# EAGLE board gimbal_controller (EAGLE 7.4.0)
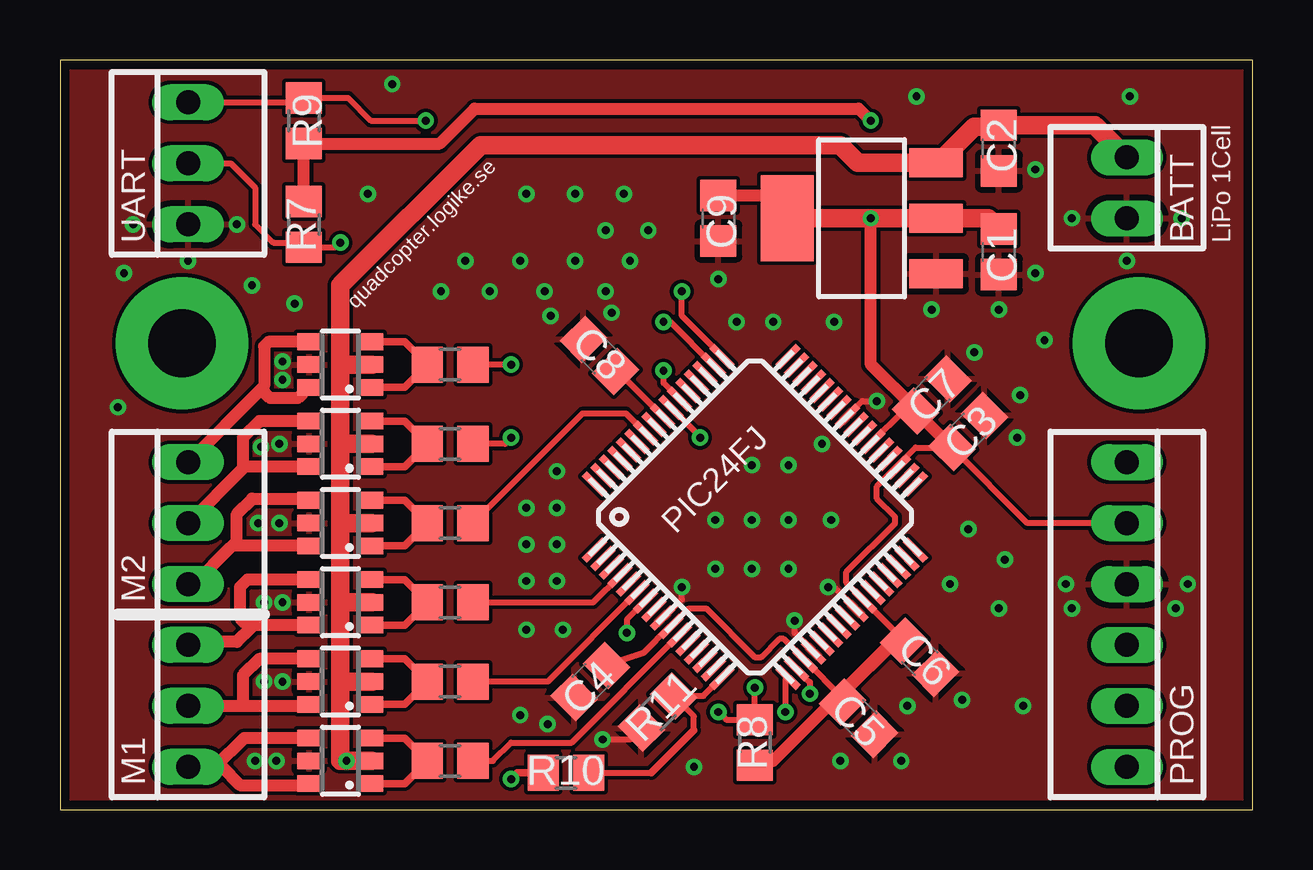
[diagram p0: board, top side]
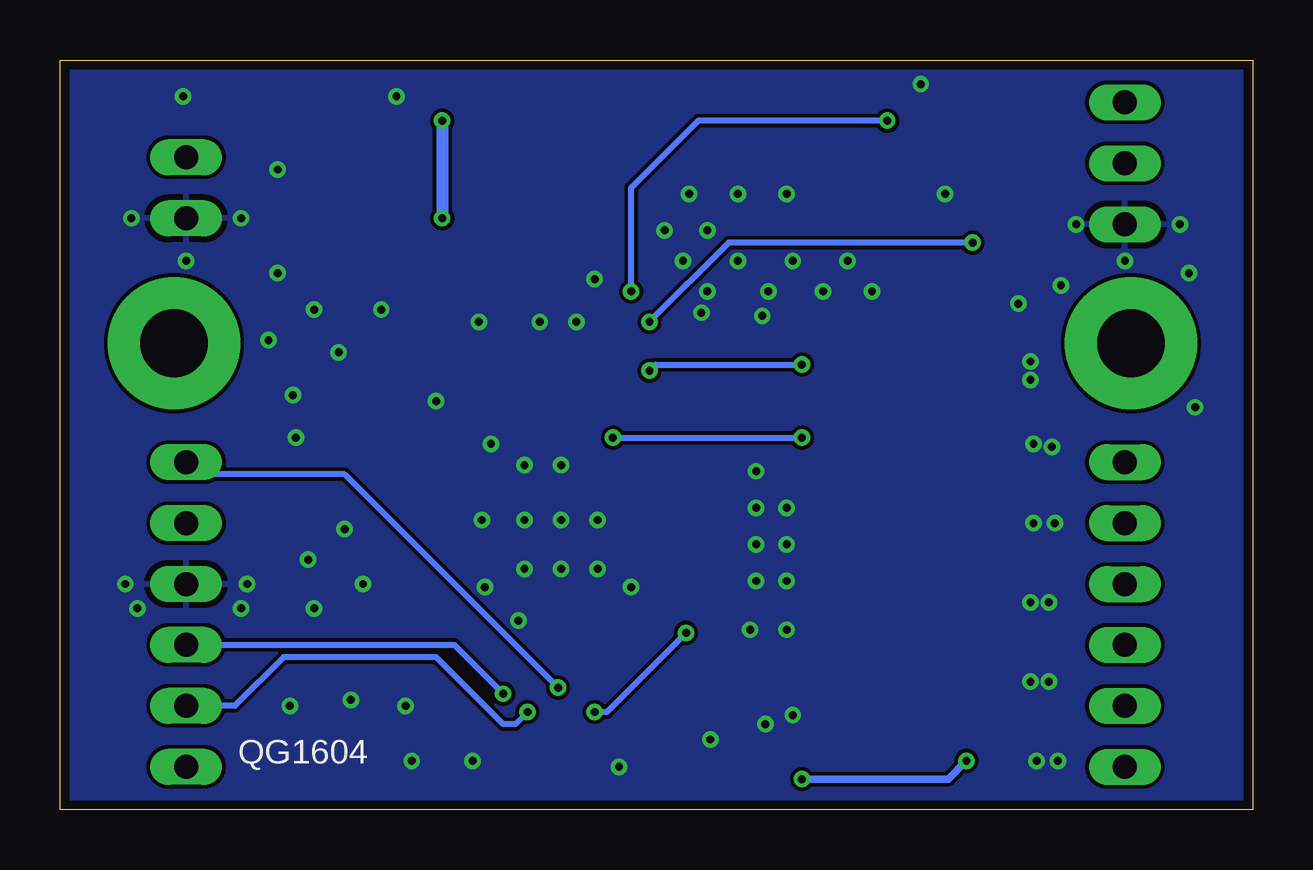
[diagram p1: board, bottom side, seen from below]

Size 49.71 x 31.23 mm. Coordinates in mm from the lower left corner, seen from the top.
Outline: 0,0 49.71,0 49.71,31.23 0,31.23 0,0
Copper layers (1*16): Top 0.0356mm / dielectric 1.5011mm / Bottom 0.0356mm
Design rules "LaenPCBOrder": minimum track width 6mil, minimum drill 13mil, track to track 6mil, track to pad 6mil, pad to pad 6mil, via to via 6mil, smd to smd 6mil, copper to edge 15mil, drill to drill 6mil, minimum pad ring 7mil, minimum via ring 7mil, stop-mask expansion 3mil, vias tented up to drill 0mil, thermal gap 10mil

## Footprints (pad centres in the part's own frame; a part is rotated, then mirrored left to right if it is on the bottom)
22-23-2021 = drill 1 long: 1 -1.27,0; 2 1.27,0
C0805 = smd 1.3 x 1.5: 1 -0.95,0; 2 0.95,0
R0805 = smd 1.3 x 1.5: 1 -0.95,0; 2 0.95,0
SSOT6 = smd 0.69 x 0.99: 1 -0.95,-1.3; 2 0,-1.3; 3 0.95,-1.3; 4 0.95,1.3; 5 0,1.3; 6 -0.95,1.3
TQFP64-10X10 = smd 1.2 x 0.3: 1 -5.7,3.75; 2 -5.7,3.25; 3 -5.7,2.75; 4 -5.7,2.25; 5 -5.7,1.75; 6 -5.7,1.25; 7 -5.7,0.75; 8 -5.7,0.25; 9 -5.7,-0.25; 10 -5.7,-0.75; 11 -5.7,-1.25; 12 -5.7,-1.75; 13 -5.7,-2.25; 14 -5.7,-2.75; 15 -5.7,-3.25; 16 -5.7,-3.75; 33 5.7,-3.75; 34 5.7,-3.25; 35 5.7,-2.75; 36 5.7,-2.25; 37 5.7,-1.75; 38 5.7,-1.25; 39 5.7,-0.75; 40 5.7,-0.25; 41 5.7,0.25; 42 5.7,0.75; 43 5.7,1.25; 44 5.7,1.75; 45 5.7,2.25; 46 5.7,2.75; 47 5.7,3.25; 48 5.7,3.75 | smd 0.3 x 1.2: 17 -3.75,-5.7; 18 -3.25,-5.7; 19 -2.75,-5.7; 20 -2.25,-5.7; 21 -1.75,-5.7; 22 -1.25,-5.7; 23 -0.75,-5.7; 24 -0.25,-5.7; 25 0.25,-5.7; 26 0.75,-5.7; 27 1.25,-5.7; 28 1.75,-5.7; 29 2.25,-5.7; 30 2.75,-5.7; 31 3.25,-5.7; 32 3.75,-5.7; 49 3.75,5.7; 50 3.25,5.7; 51 2.75,5.7; 52 2.25,5.7; 53 1.75,5.7; 54 1.25,5.7; 55 0.75,5.7; 56 0.25,5.7; 57 -0.25,5.7; 58 -0.75,5.7; 59 -1.25,5.7; 60 -1.75,5.7; 61 -2.25,5.7; 62 -2.75,5.7; 63 -3.25,5.7; 64 -3.75,5.7
SOT223 = smd 1.219 x 2.235: 1 -2.311,-3.099; 2 0,-3.099; 3 2.311,-3.099 | smd 3.6 x 2.2: 4 0,3.099
22-23-2061 = drill 1 long: 1 -6.35,0; 2 -3.81,0; 3 -1.27,0; 4 1.27,0; 5 3.81,0; 6 6.35,0
22-23-2031 = drill 1 long: 1 -2.54,0; 2 0,0; 3 2.54,0

## Placement (x,y rotation side)
BATT  22-23-2021  [22-23-2021]  44.45,25.91 270 top
C1  4.7u  [C0805]  39.12,23.24 270 top
C2  4.7u  [C0805]  39.12,27.56 270 top
C3  0.1u  [C0805]  37.85,15.75 45 top
C4  0.1u  [C0805]  22.1,5.33 225 top
C5  0.1u  [C0805]  33.27,3.81 315 top
C6  0.1u  [C0805]  35.81,6.35 315 top
C7  0.1u  [C0805]  36.32,17.27 45 top
C8  10u  [C0805]  22.48,18.92 135 top
C9  4.7u  [C0805]  27.43,24.64 270 top
R1  200  [R0805]  16.26,2.03 0 top
R2  200  [R0805]  16.26,5.33 0 top
R3  200  [R0805]  16.26,8.64 0 top
R4  200  [R0805]  16.26,11.94 0 top
R5  200  [R0805]  16.26,15.24 0 top
R6  200  [R0805]  16.26,18.54 0 top
R7  2k  [R0805]  10.16,24.38 90 top
R8  10k  [R0805]  28.96,2.79 90 top
R9  2k  [R0805]  10.16,28.7 270 top
R10  1.54k  [R0805]  21.08,1.52 180 top
R11  2k  [R0805]  24.89,4.06 45 top
U$1  HALFBRIDGE  [SSOT6]  11.68,2.03 90 top
U$2  HALFBRIDGE  [SSOT6]  11.68,5.33 90 top
U$3  HALFBRIDGE  [SSOT6]  11.68,8.64 90 top
U$4  HALFBRIDGE  [SSOT6]  11.68,11.94 90 top
U$5  HALFBRIDGE  [SSOT6]  11.68,15.24 90 top
U$6  HALFBRIDGE  [SSOT6]  11.68,18.54 90 top
U$7  PIC24FJ  [TQFP64-10X10]  28.96,12.19 45 top
U$8  LDO33  [SOT223]  33.4,24.64 90 top
X1  PROG  [22-23-2061]  44.45,8.13 270 top
X3  22-23-2031  [22-23-2031]  5.33,26.92 90 top
X4  MOTOR  [22-23-2061]  5.33,8.13 90 top

## Library data of the parts
BATT = con-molex; MF: MOLEX; MPN: 22-23-2021; OC_FARNELL: 1462926; OC_NEWARK: 25C3832
C1-C9 R7 R9-R11 = resistor
R1-R6 R8 = rcl
U$1-U$6 = gibal
U$7 U$8 = gimbal
X1 X4 = con-molex; MF: MOLEX; MPN: 22-23-2061; OC_FARNELL: 1462922; OC_NEWARK: 27C1933
X3 = con-molex; MF: MOLEX; MPN: 22-23-2031; OC_FARNELL: 1462950; OC_NEWARK: 30C0862

## Nets
ADC: R10.1 R11.2 U$7.16
GND: BATT.2 C1.2 C2.2 C3.2 C4.2 C5.2 C6.2 C7.2 C8.2 C9.2 R11.1 U$1.5 U$2.5 U$3.5 U$4.5 U$5.5 U$6.5 U$7.9 U$7.20 U$7.25 U$7.41 U$8.1 X1.3 X3.1
M1G1: R1.1 U$1.1 U$1.3
M1G2: R2.1 U$2.1 U$2.3
M1G3: R3.1 U$3.1 U$3.3
M1P1: U$1.4 U$1.6 X4.1
M1P2: U$2.4 U$2.6 X4.2
M1P3: U$3.4 U$3.6 X4.3
M2G1: R4.1 U$4.1 U$4.3
M2G2: R5.1 U$5.1 U$5.3
M2G3: R6.1 U$6.1 U$6.3
M2P1: U$4.4 U$4.6 X4.4
M2P2: U$5.4 U$5.6 X4.5
M2P3: U$6.4 U$6.6 X4.6
MCLR: R8.2 U$7.7 X1.1
N$3: C8.1 U$7.56
NC: X1.6
PGEC2: U$7.17 X1.5
PGED2: U$7.18 X1.4
PWM1: R3.2 U$7.4
PWM2: R2.2 U$7.6
PWM3: R1.2 U$7.11
PWM4: R6.2 U$7.54
PWM5: R5.2 U$7.55
PWM6: R4.2 U$7.58
RX: R7.1 U$7.50 X3.2
TX: R9.1 U$7.49 X3.3
VCC: BATT.1 C2.1 R10.2 U$1.2 U$2.2 U$3.2 U$4.2 U$5.2 U$6.2 U$8.3
VDD: C1.1 C3.1 C4.1 C5.1 C6.1 C7.1 C9.1 R7.2 R8.1 R9.2 U$7.10 U$7.19 U$7.26 U$7.35 U$7.38 U$8.2 U$8.4 X1.2

## Tracks (layer width: path | path; a pad name or v marks a point on that pad's centre or on a via)
ADC
  Top 0.254: U$7.16 26.8,4.74 R11.2 26.42,3.88 26.42,3.3 | R10.1 24.64,1.52
  Top 0.305: 24.64,1.52 26.42,3.3
GND  (via drill 0.33, 0.33 pad 0.3)
  Top 0.254: U$7.41 33.43,17.02 v34.04,17.02 | U$7.25 33.16,8.37 32.26,9.27 v32,9.27 | U$7.20 30.61,7.37 v30.61,7.87 | U$7.9 25.13,7.99 25.91,8.76 v25.91,9.27 | v22.61,2.92 23.75,2.92 R11.1
  other vias: 39.88,15.49 38.1,19.05 31.75,15.24 20.32,3.56 35.05,2.03 37.59,4.57 20.45,20.57 22.99,20.7 9.27,18.67 9.27,17.91 8.38,15.11 9.14,15.24 8.26,11.94 9.14,11.94 8.13,2.03 9.02,2.03 8.51,5.33 9.27,5.33 8.51,8.64 9.27,8.64 40.01,17.27 41.91,9.4 42.16,8.38 46.48,8.38 46.99,9.4 3.05,24.38 7.37,24.38 5.33,22.86 27.43,22.1 36.32,20.83 39.12,20.83 40.64,22.35 40.64,26.67 42.16,24.64 44.45,22.86 46.74,24.64 19.43,25.65 21.46,25.65 23.5,25.65 22.73,24.13 24.51,24.13 16.89,22.86 19.18,22.86 21.46,22.86 23.75,22.86 15.88,21.59 17.91,21.59 20.19,21.59 22.73,21.59 20.7,14.1 20.7,12.57 20.7,11.05 20.7,9.53 19.43,12.57 19.43,11.05 19.43,9.53 28.83,12.06 30.35,14.35 28.83,14.35 30.35,12.06 27.3,12.06 27.3,10.03 28.83,10.03 30.35,10.03 32.13,12.06 8,21.84 9.78,21.08 2.67,22.35 2.41,16.76 12.83,25.65 35.69,29.72 44.58,29.72 41.02,19.56 37.85,11.68 37.08,9.4 39.37,10.41 39.12,8.38 20.95,7.49 19.43,7.49 19.18,3.94 32.51,2.03 35.31,4.32 40.13,4.32 26.42,1.78 32.26,20.32 29.72,20.32 28.19,20.32 13.84,30.23
  pour Top: 0,31.24 49.78,31.24 49.78,0 0,0
  pour Bottom: 0,31.24 49.78,31.24 49.78,0 0,0
M1G1
  Top 0.305: U$1.1 14.36,1.08 R1.1 14.36,2.98 U$1.3
M1G2
  Top 0.305: U$2.1 14.36,4.38 R2.1 14.36,6.28 U$2.3
M1G3
  Top 0.305: U$3.1 14.36,7.69 R3.1 14.36,9.59 U$3.3
M1P1
  Top 0.508: X4.1 6.48,1.78 | 6.48,1.78 6.73,1.78 7.49,1.02 10.32,1.02 U$1.6 | U$1.4 7.68,2.98 6.48,1.78
M1P2
  Top 0.508: X4.2 7.49,4.32 | 7.49,4.32 10.32,4.32 U$2.6 | U$2.4 8.32,6.28 7.62,5.59 7.62,4.45 7.49,4.32
M1P3
  Top 0.508: U$3.6 8.07,7.69 7.94,7.56 | 7.94,7.56 7.37,6.99 5.46,6.99 X4.3 | U$3.4 7.81,9.59 7.49,9.27 7.49,8 7.94,7.56
M2G1
  Top 0.305: U$4.3 14.36,12.89 R4.1 14.36,10.99 U$4.1
M2G2
  Top 0.305: U$5.1 14.36,14.29 R5.1 14.36,16.19 U$5.3
M2G3
  Top 0.305: U$6.1 14.36,17.59 R6.1 14.36,19.49 U$6.3
M2P1
  Top 0.508: X4.4 5.59,9.4 7.11,10.92 7.18,10.99 | 7.18,10.99 7.37,11.18 7.37,12.32 8,12.95 10.32,12.95 U$4.4 | U$4.6 7.18,10.99
M2P2
  Top 0.508: U$5.4 8.32,16.19 7.62,15.49 7.62,14.22 | 7.62,14.22 X4.5 | U$5.6 7.69,14.29 7.62,14.22
M2P3
  Top 0.508: U$6.4 8.7,19.49 8.51,19.3 8.51,17.65 8.38,17.53 | 8.38,17.53 X4.6 | U$6.6 10.35,17.59 9.91,17.14 8.76,17.14 8.38,17.53
MCLR  (via drill 0.33)
  Top 0.254: U$7.7 23.62,7.92 v23.62,7.37 | v27.43,4.06 27.75,3.74 R8.2 v28.96,5.08
  Bottom 0.254: v23.62,7.37 26.92,4.06 v27.43,4.06 | v28.96,5.08 37.85,13.97 43.94,13.97 X1.1
N$1  (via drill 2.82 pad 5.51)
  other vias: 44.96,19.43
N$2  (via drill 2.82 pad 5.51)
  other vias: 5.08,19.43
N$3
  Top 0.254: U$7.56 22.87,18.63 C8.1
PGEC2  (via drill 0.33)
  Top 0.254: U$7.17 30.23,5.4 v30.23,4.06
  Bottom 0.254: v30.23,4.06 30.73,3.56 31.24,3.56 34.04,6.35 40.39,6.35 42.42,4.32 X1.5
PGED2  (via drill 0.33)
  Top 0.254: U$7.18 31.24,5.31 v31.24,4.83
  Bottom 0.254: X1.4 33.27,6.86 v31.24,4.83
PWM1
  Top 0.254: R3.2 22.22,8.64 U$7.4
PWM2
  Top 0.254: U$7.6 20.33,5.33 R2.2
PWM3
  Top 0.254: R1.2 18.03,2.03 18.8,2.79 21.33,2.79 U$7.11
PWM4  (via drill 0.33)
  Top 0.254: U$7.54 25.15,17.77 v25.15,18.29 | v18.8,18.54 R6.2
  Bottom 0.254: v25.15,18.29 24.89,18.54 v18.8,18.54
PWM5  (via drill 0.33)
  Top 0.254: U$7.55 26.67,15.54 v26.67,15.49 | v18.8,15.49 18.54,15.24 R5.2
  Bottom 0.254: v26.67,15.49 v18.8,15.49
PWM6
  Top 0.254: R4.2 21.78,16.51 23.58,16.51 U$7.58
RX  (via drill 0.33 pad 0.3)
  Top 0.254: X3.2 7.11,26.92 8.13,25.91 8.13,24.38 8.89,23.62 9.97,23.62 R7.1 11.5,23.43 v11.68,23.62 | v25.15,20.32 25.42,20.32 U$7.50
  Bottom 0.254: v11.68,23.62 21.84,23.62 v25.15,20.32
TX  (via drill 0.33 pad 0.3)
  Top 0.254: X3.3 9.97,29.46 R9.1 12,29.65 12.95,28.7 v15.24,28.7 | v25.91,21.59 25.91,20.57 27.58,18.91 U$7.49
  Bottom 0.254: v15.24,28.7 23.11,28.7 25.91,25.91 v25.91,21.59
VCC  (via drill 0.33 pad 0.3)
  Top 0.305: R10.2 19.05,1.52 v18.8,1.27
  Top 0.762: BATT.1 43.12,28.51 C2.1 39.05,28.45 38.1,28.45 36.6,26.95 U$8.3 33.25,26.95 32.51,27.69 17.53,27.69 11.68,21.84 11.68,18.54 | 11.68,18.54 11.68,15.49 | 11.68,15.49 11.68,11.94 | 11.68,11.94 11.68,8.64 | 11.68,8.64 11.68,5.33 | 11.68,5.33 11.68,2.03 v11.94,2.03 U$1.2 | U$2.2 11.68,5.33 | U$3.2 11.68,8.64 | U$4.2 11.68,11.94 | U$5.2 11.94,15.24 11.68,15.49 | U$6.2 11.68,18.54
  Bottom 0.305: v18.8,1.27 12.7,1.27 v11.94,2.03
VDD  (via drill 0.33 pad 0.3)
  Top 0.254: C4.1 24.29,6.51 25.41,7.63 U$7.10 26.21,8.38 26.92,8.38 28.96,6.35 29.21,6.35 29.97,7.11 30.15,7.11 U$7.19 32.6,4.66 | 32.6,4.66 C5.1 | 32.6,4.66 34.97,7.02 C6.1 35.14,7.07 U$7.26 32.77,9.44 32.77,9.91 34.8,11.94 34.8,12.19 34.04,12.95 34.04,13.46 34.85,14.28 | U$7.38 35.13,16.6 C7.1 | 34.85,14.28 U$7.35 | 34.85,14.28 35.65,15.08 C3.1 40.31,11.94 X1.2
  Top 0.508: R8.1 29.14,2.03 29.72,2.03 34.71,7.02 C6.1 | C3.1 C7.1 35.65,16.67 33.78,18.54 v33.78,24.64 | U$8.4 29.35,25.59 C9.1 | v33.78,28.7 33.27,29.21 17.27,29.21 15.81,27.75 R9.2 R7.2
  Top 0.762: U$8.4 v33.78,24.64 U$8.2 38.67,24.64 C1.1
  Bottom 0.508: v33.78,28.7 v33.78,24.64

## Text on the board
tPlace: quadcopter.logike.se | UART | LiPo 1Cell | PIC24FJ | M2 | M1 | PROG
bPlace: QG1604